# EAGLE board PIC 16F877A Board_V4.2 (SMD) (EAGLE 9.6.2)
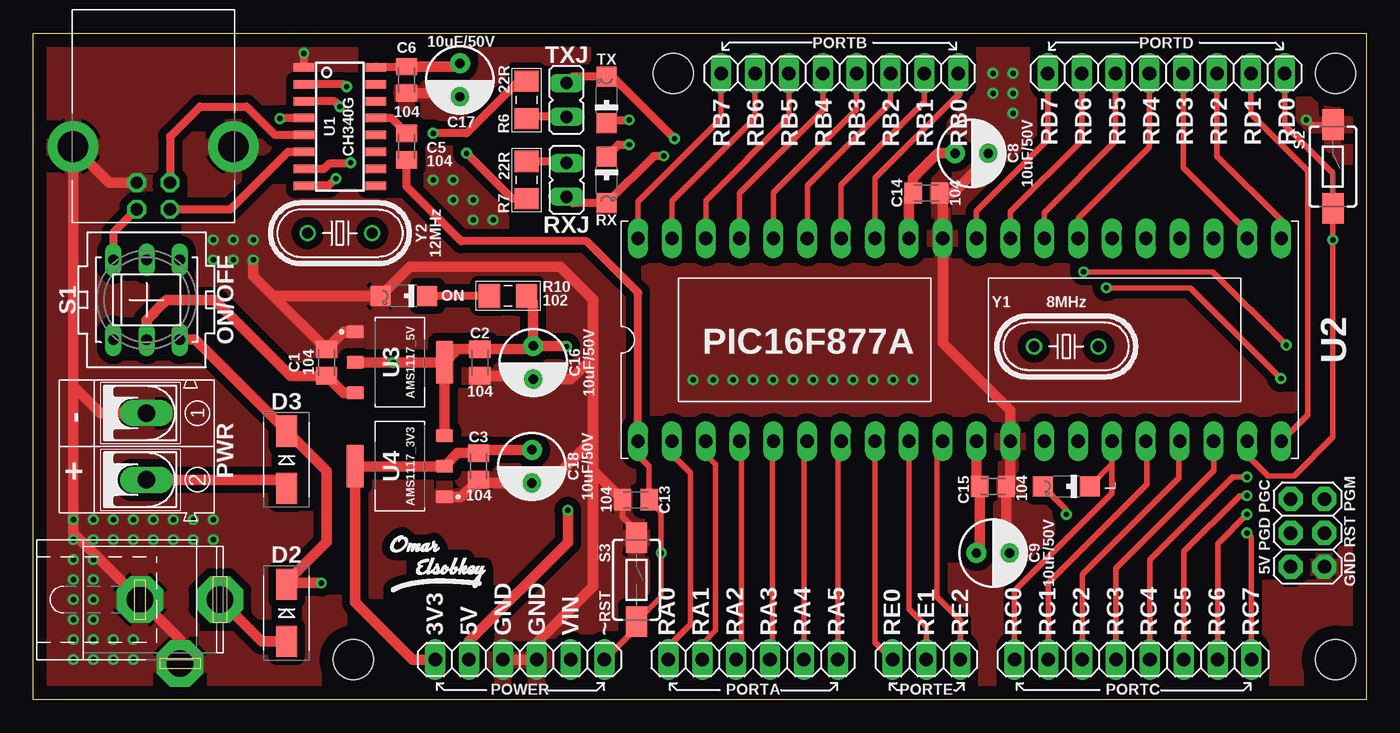
[diagram p0: board, top side]
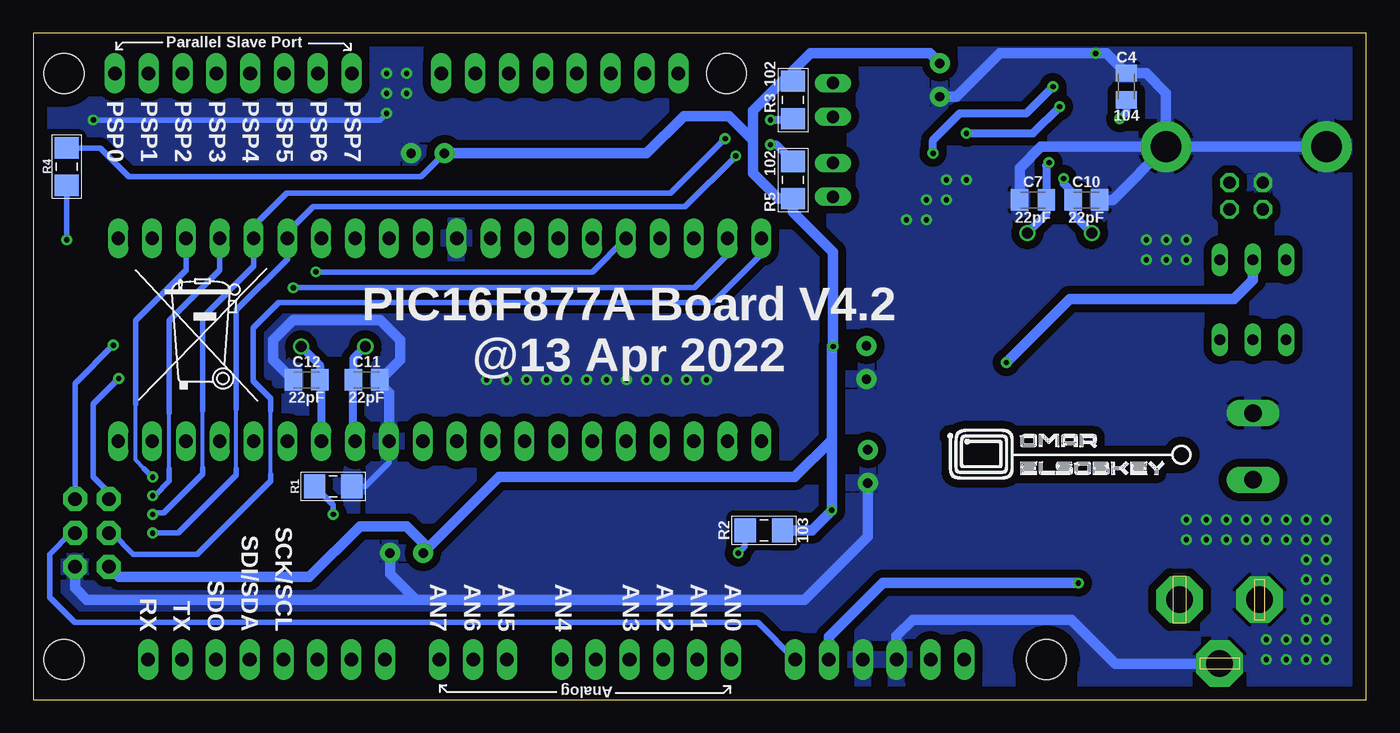
[diagram p1: board, bottom side, seen from below]

Size 100 x 50 mm. Coordinates in mm from the lower left corner, seen from the top.
Outline: 0,50 100,50 100,0 0,0 0,50
Copper layers (1*16): Top 0.035mm / dielectric 1.5mm / Bottom 0.035mm
Design rules "default *": minimum track width 0.3mm, minimum drill 0.4mm, track to track 0.3mm, track to pad 0.3mm, pad to pad 0.3mm, via to via 0.3mm, smd to smd 0.3mm, copper to edge 40mil, drill to drill 6mil, minimum pad ring 5mil, minimum via ring 8mil, stop-mask expansion 4mil, vias tented up to drill 0mil, thermal gap 10mil
Holes 3 mm at 97.7,47 24,3 48,47 97.7,3

## Footprints (pad centres in the part's own frame; a part is rotated, then mirrored left to right if it is on the bottom)
C0805K = smd 1.3 x 1.6: 1 -1,0; 2 1,0
D5 = drill 0.7 pad 1.5: A 1.25,0; K -1.25,0
SMA/DO-214AC = smd 2.33 x 1.56: 1 -2.14,0; 2 2.14,0
SPC4077 = drill 2 pad 3.5 octagon: 1 -3,0; 2 0,-4.8; 3 3,0
61729-1011BLF = drill 0.92 pad 1.4 octagon: 1 1.25,4.71; 2 -1.25,4.71; 3 -1.25,2.71; 4 1.25,2.71 | drill 2.3 pad 3.8: SH1 -6.02,0; SH2 6.02,0
CHIPLED_1206 = smd 1.5 x 1.5: A 0,-1.75; C 0,1.75
1X06 = drill 1.016 long: 1 -6.35,0; 2 -3.81,0; 3 -1.27,0; 4 1.27,0; 5 3.81,0; 6 6.35,0
1X08 = drill 1.016 long: 1 -8.89,0; 2 -6.35,0; 3 -3.81,0; 4 -1.27,0; 5 1.27,0; 6 3.81,0; 7 6.35,0; 8 8.89,0
1X03 = drill 1.016 long: 1 -2.54,0; 2 0,0; 3 2.54,0
2X03 = drill 1.016 pad 1.8 octagon: 1 -2.54,-1.27; 2 -2.54,1.27; 3 0,-1.27; 4 0,1.27; 5 2.54,-1.27; 6 2.54,1.27
2P = drill 1.321 long: 1 -2.5,0; 2 2.5,0
1206 = smd 1.6 x 1.8: 1 -1.4,0; 2 1.4,0
JP1 = drill 0.914 long: 1 0,-1.27; 2 0,1.27
PVA2R = drill 0.813 long: 1 -2.997,2.489; 2 -2.997,0; 3 -2.997,-2.489; 4 2.997,2.489; 5 2.997,0; 6 2.997,-2.489
TACTILE_SWITCH_SMD_6.0X3.5MM = smd 2.3 x 1.6: 1 -3.15,0; 2 3.15,0
SOP-16 = smd 0.635 x 1.524: 1 -4.445,-2.695; 2 -3.175,-2.695; 3 -1.905,-2.695; 4 -0.635,-2.695; 5 0.635,-2.695; 6 1.905,-2.695; 7 3.175,-2.695; 8 4.445,-2.695; 9 4.445,2.695; 10 3.175,2.695; 11 1.905,2.695; 12 0.635,2.695; 13 -0.635,2.695; 14 -1.905,2.695; 15 -3.175,2.695; 16 -4.445,2.695
PDIP-40 = drill 0.991 pad 1.2 long: 1 -7.62,24.13; 2 -7.62,21.59; 3 -7.62,19.05; 4 -7.62,16.51; 5 -7.62,13.97; 6 -7.62,11.43; 7 -7.62,8.89; 8 -7.62,6.35; 9 -7.62,3.81; 10 -7.62,1.27; 11 -7.62,-1.27; 12 -7.62,-3.81; 13 -7.62,-6.35; 14 -7.62,-8.89; 15 -7.62,-11.43; 16 -7.62,-13.97; 17 -7.62,-16.51; 18 -7.62,-19.05; 19 -7.62,-21.59; 20 -7.62,-24.13; 21 7.62,-24.13; 22 7.62,-21.59; 23 7.62,-19.05; 24 7.62,-16.51; 25 7.62,-13.97; 26 7.62,-11.43; 27 7.62,-8.89; 28 7.62,-6.35; 29 7.62,-3.81; 30 7.62,-1.27; 31 7.62,1.27; 32 7.62,3.81; 33 7.62,6.35; 34 7.62,8.89; 35 7.62,11.43; 36 7.62,13.97; 37 7.62,16.51; 38 7.62,19.05; 39 7.62,21.59; 40 7.62,24.13
SOT223 = smd 0.93 x 1.31: 1 -2.29,-3.345; 2 0,-3.345; 3 2.29,-3.345 | smd 3.24 x 1.31: 4 0,3.345
HC49U = drill 0.813: 1 -2.413,0; 2 2.413,0

## Placement (x,y rotation side)
C1  104  [C0805K]  22,25.3 90 top
C2  104  [C0805K]  33.5,25.3 270 top
C3  104  [C0805K]  33.4,17.5 270 top
C4  104  [C0805K]  18,46 270 bottom
C5  104  [C0805K]  28,41.5 270 top
C6  104  [C0805K]  28,46.5 270 top
C7  22pF  [C0805K]  25,37.5 180 bottom
C8  10uF/50V  [D5]  70.4,41 180 top
C9  10uF/50V  [D5]  72,11 180 top
C10  22pF  [C0805K]  21,37.5 0 bottom
C11  22pF  [C0805K]  75,24 0 bottom
C12  22pF  [C0805K]  79.5,24 180 bottom
C13  104  [C0805K]  45.2,15 180 top
C14  104  [C0805K]  67,38 0 top
C15  104  [C0805K]  72,16 0 top
C16  10uF/50V  [D5]  37.5,25.3 90 top
C17  10uF/50V  [D5]  32,46.5 90 top
C18  10uF/50V  [D5]  37.4,17.5 90 top
D2  DIODE_SMD  [SMA/DO-214AC]  19,6.5 270 top
D3  DIODE_SMD  [SMA/DO-214AC]  19,18 270 top
J1  [SPC4077]  11,7.5 0 top
J2  61729-1011  [61729-1011BLF]  9,41.5 180 top
L  [CHIPLED_1206]  77.5,16 90 top
ON  [CHIPLED_1206]  27.8,30.3 90 top
PORTA  [1X06]  54,3 0 top
PORTB  [1X08]  60.5,47 180 top
PORTC  [1X08]  82.5,3 0 top
PORTD  [1X08]  85,47 180 top
PORTE  [1X03]  67,3 0 top
POWER  [1X06]  36.5,3 180 top
PROGRAMMING  [2X03]  95.6,12.5 270 top
PWR  [2P]  8.5,19 270 top
R1  102  [1206]  77.5,16 180 bottom
R2  103  [1206]  45.2,12.7 0 bottom
R3  102  [1206]  43,45 90 bottom
R4  103  [1206]  97.5,40 90 bottom
R5  102  [1206]  43,39 270 bottom
R6  22R  [1206]  37,45 270 top
R7  22R  [1206]  37,39 90 top
R10  102  [1206]  35.6,30.3 0 top
RX  [CHIPLED_1206]  43,39 180 top
RXJ  [JP1]  40,39 0 top
S1  ON/OFF  [PVA2R]  8.5,30 270 top
S2  FLASH  [TACTILE_SWITCH_SMD_6.0X3.5MM]  97.5,40 270 top
S3  RST  [TACTILE_SWITCH_SMD_6.0X3.5MM]  45.25,9 270 top
TX  [CHIPLED_1206]  43,45 0 top
TXJ  [JP1]  40,45 180 top
U1  CH340G  [SOP-16]  23,43 270 top
U2  PIC16F877A  [PDIP-40]  69.5,27 90 top
U3  AMS1117_5V  [SOT223]  27.5,25.3 270 top
U4  AMS1117_3V3  [SOT223]  27.5,17.5 90 top
U$1  [OMAR_ELSOBKEY_2_X1_T]  28.8,18.45 0 bottom
U$2  [OMAR_ELSOBKEY_2_X1_TP]  28.8,18.45 0 bottom
U$3  [OMAR_ELSOBKEY_1_X0.5_TN]  30,10 0 top
U$4  [MUELLTONNE_10.00]  93,22 0 bottom
U$5  [OMAR_ELSOBKEY_1_X0.5_T]  30,10 0 top
Y1  8MHz  [HC49U]  77.5,26.5 180 top
Y2  12MHz  [HC49U]  23,35 0 top

## Library data of the parts
C1-C7 C10-C15 = rcl; SPICEPREFIX: C
C8 C9 C16-C18 = Capacitors
D2 D3 = Diode SMD; AVAILABILITY: In Stock; DESCRIPTION: SMD Diodo Rectificador 1A 50V S1A SMD DO-214AC/SMA DIOTEC; MF: NKK Switches; MP: S1A; PACKAGE: DO-214 Diotec; PRICE: None
J1 = con-jack; OC_FARNELL: unknown; OC_NEWARK: unknown
J2 = Connector_USB; CATEGORY: Connector; CONTACTS: 4; CURRENT_RATING: 1A; DESCRIPTION: CONN RCPT USB2.0 TYPEB 4POS R/A; GENDER: Receptacle; MANUFACTURER: Amphenol ICC (FCI); MOUNT_TYPE: R/A; MPN: 61729-1011BLF; OPERATING_TEMP: -55°C to 85°C; PART_STATUS: Active; ROHS_COMPLIANT: RoHS Compliant; SERIES: 61729; SUB-CATEGORY: USB; TYPE: USB-B
L ON RX TX = led
PORTA PORTB PORTC PORTD PORTE POWER PROGRAMMING = pinhead
PWR = Terminal Block
R1-R7 R10 = SparkFun-Resistors
RXJ TXJ = jumper
S1 = switch-misc
S2 S3 = SparkFun-Switches; PROD_ID: SWCH-00815; SF_SKU: COM-08229
U1 = CH340G
U2 = PIC; AVAILABILITY: Good; DESCRIPTION: PIC PIC® 16F Microcontroller IC 8-Bit 20MHz 14KB (8K x 14) FLASH 44-TQFP (10x10); MF: Microchip; MP: PIC16F877A-I/P; PACKAGE: DIP-40 Microchip; PRICE: None; PURCHASE-URL: https://pricing.snapeda.com/search/part/PIC16F877A-I/P/?ref=eda
U3 U4 = v-reg
U$1-U$3 U$5 = Logos
U$4 = logo
Y1 Y2 = SparkFun-Clocks

## Nets
+3V3: C3.1 C18.A POWER.6 U4.2 U4.4
+5V: C2.1 C6.1 C8.A C9.A C14.1 C15.1 C16.A C17.A POWER.5 PROGRAMMING.5 R2.2 R3.2 R4.2 R5.2 R10.2 S1.2 U1.16 U2.11 U2.32 U3.2 U3.4 U4.3
+5V_USB: J2.1 S1.3
D+: J2.3 U1.5
D-: J2.2 U1.6
DTR: C5.1 U1.13
GND [GND]: C1.2 C2.2 C3.2 C4.1 C6.2 C7.2 C8.K C9.K C10.2 C11.2 C12.2 C13.2 C14.2 C15.2 C16.K C17.K C18.K J1.1 J1.2 J2.4 J2.SH1 J2.SH2 ON.C POWER.3 POWER.4 PROGRAMMING.6 PWR.1 R1.1 S2.1 S3.1 U1.1 U2.12 U2.31 U3.1 U4.1
N$1: R6.2 TXJ.2
N$2: R3.1 TX.A
N$3: R5.1 RX.A
N$5: L.C R1.2
N$7: D2.2 J1.3
N$8: R7.2 RXJ.2
N$13: D3.2 PWR.2
N$32: C1.1 S1.5 U3.3
N$36: ON.A R10.1
OSC1: C11.1 U2.13 Y1.2
OSC2: C12.1 U2.14 Y1.1
RA0/AN0: PORTA.1 U2.2
RA1/AN1: PORTA.2 U2.3
RA2/AN2: PORTA.3 U2.4
RA3/AN3: PORTA.4 U2.5
RA4: PORTA.5 U2.6
RA5/AN4: PORTA.6 U2.7
RB0: PORTB.1 U2.33
RB1: PORTB.2 U2.34
RB2: PORTB.3 U2.35
RB3/PGM: PORTB.4 PROGRAMMING.2 U2.36
RB4: PORTB.5 U2.37
RB5: PORTB.6 U2.38
RB6/PGC: PORTB.7 PROGRAMMING.1 U2.39
RB7/PGD: PORTB.8 PROGRAMMING.3 U2.40
RC0: L.A PORTC.1 U2.15
RC1: PORTC.2 U2.16
RC2: PORTC.3 U2.17
RC3/SCK/SCL: PORTC.4 U2.18
RC4/SDI/SDA: PORTC.5 U2.23
RC5/SDO: PORTC.6 U2.24
RD0/PSP0: PORTD.1 R4.1 S2.2 U2.19
RD1/PSP1: PORTD.2 U2.20
RD2/PSP2: PORTD.3 U2.21
RD3/PSP3: PORTD.4 U2.22
RD4/PSP4: PORTD.5 U2.27
RD5/PSP5: PORTD.6 U2.28
RD6/PSP6: PORTD.7 U2.29
RD7/PSP7: PORTD.8 U2.30
RE0/AN5: PORTE.1 U2.8
RE1/AN6: PORTE.2 U2.9
RE2/AN7: PORTE.3 U2.10
RST: C5.2 C13.1 POWER.1 PROGRAMMING.4 R2.1 S3.2 U2.1
RX: R6.1 U1.3
RXC: PORTC.8 RX.C RXJ.1 U2.26
TX: R7.1 U1.2
TXC: PORTC.7 TX.C TXJ.1 U2.25
V3: C4.2 U1.4
VIN: D2.1 D3.1 POWER.2 S1.4
XI: C7.1 U1.7 Y2.2
XO: C10.1 U1.8 Y2.1

## Tracks (layer width: path | path; a pad name or v marks a point on that pad's centre or on a via)
+3V3
  Top 0.8: C3.1 32.04,18.5 | POWER.6 28.45,3 24.16,7.3 U4.4 U4.2 31.84,18.5 C3.1 | C3.1 33.65,18.75 C18.A
+5V  (via drill 0.4)
  Top 0.6: U1.16 25.75,47.5 C6.1 | C14.1 65.69,37.69 | C15.1 70.77,16.23 | C9.A 71,11.25 | U3.4 30.84,24.14
  Top 0.8: C17.A 31.75,47.5 C6.1 | 65.69,37.69 U2.32 | C8.A 67.85,41 66,39.15 C14.1 | 70.77,16.23 U2.11 | 71,11.25 C15.1 | v40,26.5 39.95,26.55 C16.A | 33.75,26.55 C2.1 | U3.4 U4.3 | POWER.5 32.69,4.39 40.1,11.8 v40.1,14.2 | U3.2 v27,25.3 U3.4 | C16.A 37.25,26.3 C2.1 | C2.1 31.84,26.3 | U3.4 31.84,26.3 | 31.84,26.3 30.9,26.3 30.7,26.1 30.7,25.45 U3.4 | R10.2 37.5,29.8 C16.A
  Bottom 0.406: C8.A 70.9,39.25 92.85,39.25 95,41.4 R4.2
  Bottom 0.8: 40.1,19.5 v40.1,14.2 41.6,12.7 R2.2 | 40.1,19.5 40.1,26.5 v40,26.5 40,33.6 43,36.6 R5.2 44.1,37.6 46,39.5 46,42 | 46,42 46,44.2 43.8,46.4 R3.2 43,47.18 41.68,48.5 32.75,48.5 C17.A | 46,42 47.8,43.8 51.2,43.8 54,41 C8.A | S1.2 8.5,31.5 9.95,30.05 22.25,30.05 v27,25.3 | PROGRAMMING.5 93.56,9.19 79.31,9.19 75.5,13 72,13 70.75,11.75 C9.A 65.05,16.7 42.9,16.7 40.1,19.5
+5V_USB
  Top 0.6: S1.3 6,35.04 J2.1
D+
  Top 0.6: U1.5 18.14,42.37 16,44.5 12.5,44.5 10.25,42.25 J2.3
D-
  Top 0.6: J2.2 14.79,36.79 19.09,41.09 U1.6
DTR
  Top 0.6: C5.1 26.86,43.63 U1.13
GND  (via drill 0.4)
  Top 0.406: S2.1 95.85,43.15 v95.5,43.5 | C13.2 44.2,13.7 45.25,12.65 S3.1
  Top 0.6: 24.45,27.59 U3.1 | C14.2 68.23,37.77 | C9.K 73,11.25 | C13.2 44.1,14.9 | U1.1 v20.3,48.5
  Top 0.8: 2.98,23.52 J2.SH2 5.69,38.79 J2.4 | 2.98,23.52 2.98,12.52 J1.1 11,4.5 J1.2 | C17.K 31.75,45.5 C6.2 | 37.15,16.5 C18.K | 36.45,16.25 C18.K | 41.99,25.7 41.99,30 39.5,32.5 28.25,32.5 ON.C 18,30.3 | 41.99,25.7 41.99,19.5 | 68.23,37.77 U2.31 68.23,26.77 73.31,21.69 U2.12 73.31,16.31 C15.2 73,11.25 | C8.K 71.65,40.65 69,38 C14.2 | PWR.1 5,21.5 2.98,23.52 | POWER.4 POWER.3 37.77,4.27 41.99,8.49 41.99,17.2 | U3.1 23.29,27.59 C1.2 18,30.3 | U4.1 32.11,15.21 C3.2 33.65,16.25 C18.K | C2.2 37.2,24.3 37.5,24 C16.K 40.34,24.05 41.99,25.7 | 41.99,17.2 41.99,19.5 | C13.2 41.99,17.2 | C18.K 38.74,16.25 41.99,19.5 | 18,30.3 16.5,31.8 v16.5,33
  Bottom 0.406: R1.1 75.1,16 73.31,17.79 U2.12 | v95.5,43.5 74,43.5 v73.5,44
  Bottom 0.6: J2.SH1 15.02,41.48 15,41.5
  Bottom 0.8: C17.K 30.75,45.25 27.5,48.5 v20.3,48.5 19.5,48.5 C4.1 16.5,47 15.02,45.52 J2.SH1 | J2.SH1 J2.SH2 | J2.SH1 19.02,37.5 C10.2 | J2.SH1 24.4,41.5 26,39.9 C7.2 | J1.2 18.84,2.7 22.14,6 34,6 35.23,4.77 POWER.4 | 71.3,7.5 96,7.5 96.87,8.37 PROGRAMMING.6 | C9.K 73.25,9.45 71.3,7.5 | U2.12 73.31,23.01 74,23.7 C11.2 72.5,25.5 72.5,27 74,28.5 80.5,28.5 82,27 82,25.5 C12.2 | C18.K 37.4,12.26 42.16,7.5 71.3,7.5
  other vias: 3,13.5 13.5,13.5 12,13.5 10.5,13.5 9,13.5 7.5,13.5 6,13.5 4.5,13.5 13.5,12 12,12 10.5,12 9,12 7.5,12 6,12 4.5,12 3,12 4.5,10.5 3,10.5 4.5,9 4.5,7.5 3,9 3,7.5 3,6 4.5,6 3,4.5 4.5,4.5 6,4.5 7.5,4.5 7.5,3 6,3 4.5,3 3,3 16.5,34.5 15,33 15,34.5 13.5,33 13.5,34.5 31.5,39 33,37.5 34.5,36 33,36 31.5,37.5 30,39 73.5,47 72,47 73.5,45.5 51,24 52.5,24 49.5,24 55.5,24 57,24 54,24 60,24 61.5,24 58.5,24 64.5,24 66,24 63,24 72,45.5
  pour Bottom (isolate 0.6): 102,52 102,-2 -2,-2 -2,52
  pour Top (isolate 0.6): -2,52 102,52 102,-2 -2,-2
N$1
  Top 0.6: R6.2 37.13,43.73 TXJ.2
N$2  (via drill 0.4)
  Top 0.6: TX.A 43.25,43.5 v44.7,43.5
  Bottom 0.6: R3.1 43.1,43.5 v44.7,43.5
N$3  (via drill 0.4)
  Top 0.6: RX.A 43.9,41.65 v44.7,41.65
  Bottom 0.6: R5.1 44.25,41.65 v44.7,41.65
N$5  (via drill 0.4)
  Top 0.406: v77.5,13.9 77.5,14.25 L.C
  Bottom 0.406: R1.2 77.5,14.6 v77.5,13.9
N$7
  Top 0.8: J1.3 17.14,4.36 D2.2
N$8
  Top 0.6: R7.2 39.87,40.4 RXJ.2
N$13
  Top 0.8: PWR.2 18.36,16.5 D3.2
N$32
  Top 0.8: S1.5 8.5,28.5 9.75,29.75 10,30 13.6,30 19.3,24.3 C1.1 23.29,23.01 U3.3
N$36
  Top 0.6: R10.1 ON.A
OSC1
  Bottom 0.6: Y1.2 76,25.59 C11.1 76,19.53 U2.13
OSC2
  Bottom 0.6: Y1.1 78.5,25.09 C12.1 78.39,23.89 U2.14
RA0/AN0
  Top 0.406: U2.2 47.91,18.38 49.3,16.99 49.3,5.65 47.65,4 PORTA.1
RA1/AN1
  Top 0.406: PORTA.2 50.19,4.2 51.19,5.2 51.19,17.64 50.45,18.38 U2.3
RA2/AN2
  Top 0.406: U2.4 53.13,19.24 53.13,3.4 PORTA.3
RA3/AN3
  Top 0.406: U2.5 55.47,19.32 55.47,3.2 PORTA.4
RA4
  Top 0.406: 57.81,19.12 PORTA.5
  Top 0.6: U2.6 57.81,19.12
RA5/AN4
  Top 0.406: PORTA.6 60.35,19.12 U2.7
RB0
  Top 0.406: U2.33 63.15,39.15 69.39,45.39
  Top 0.6: PORTB.1 69.39,45.39
RB1
  Top 0.406: U2.34 60.61,38.61 66.85,44.85 PORTB.2
RB2
  Top 0.406: PORTB.3 64.31,44.81 58.07,38.57 U2.35
RB3/PGM  (via drill 0.4)
  Top 0.406: U2.36 55.53,38.03 61.77,44.27 PORTB.4 | v78.8,32.1 88.5,32.1 v94,26.6
  Bottom 0.406: U2.36 58.05,32.1 v78.8,32.1 | PROGRAMMING.2 96.87,23.73 v94,26.6
RB4
  Top 0.406: PORTB.5 59.23,44.23 52.99,37.99 U2.37
RB5
  Top 0.406: U2.38 50.45,37.45 56.69,43.69 PORTB.6
RB6/PGC  (via drill 0.4)
  Top 0.406: U2.39 47.91,37.41 54.15,43.65 PORTB.7 | v80.5,30.9 86.8,30.9 v93.6,24.1
  Bottom 0.406: U2.39 47.91,33.39 50.39,30.91 v80.49,30.91 v80.5,30.9 | v93.6,24.1 95.5,22.2 95.5,16.71 94.33,15.54 PROGRAMMING.1
RB7/PGD
  Top 0.406: PORTB.8 51.61,43.61 45.37,37.37 U2.40
  Bottom 0.305: 82.2,16.9 82.2,21.7
  Bottom 0.406: U2.40 45.37,33.43 49,29.8 81.6,29.8 83.5,27.9 83.5,23.9 82.2,22.6 82.2,21.7 | PROGRAMMING.3 94.1,12.5 92.5,10.9 87.7,10.9 82.2,16.4 82.2,16.9
RC0
  Top 0.406: PORTC.1 73.61,8.16 80.93,15.48 U2.15 80.93,17.68 L.A
RC1
  Top 0.406: U2.16 83.54,19.31 83.54,16.14 76.15,8.75 PORTC.2
RC2
  Top 0.406: PORTC.3 78.69,9.39 85.94,16.64 85.94,19.31 U2.17
RC3/SCK/SCL
  Top 0.406: PORTC.4 81.23,9.86 88.55,17.18 U2.18
RC4/SDI/SDA  (via drill 0.4)
  Top 0.406: PORTC.5 83.77,10.47 90,16.7 v91.05,16.7
  Bottom 0.305: 91.67,17.32 92.34,17.99 92.34,22.2
  Bottom 0.406: U2.23 88.55,32.21 92.34,28.43 92.34,22.2 | v91.05,16.7 91.67,17.32
RC5/SDO  (via drill 0.4)
  Top 0.406: v91.05,15.3 90.5,15.3 86.31,11.11 PORTC.6
  Bottom 0.305: 89.8,17.3 89.8,21.5
  Bottom 0.406: U2.24 86.01,32.22 89.8,28.43 89.8,21.5 | 89.8,17.3 89.8,16.4 90.9,15.3 v91.05,15.3
RD0/PSP0  (via drill 0.4)
  Top 0.406: U2.19 91.09,18.32 92.61,16.79 94.6,16.79 97.5,19.69 v97.5,34.5 S2.2 97.5,39.5 93.89,43.11 PORTD.1 93.89,46.5
  Bottom 0.406: R4.1 v97.5,34.5
RD1/PSP1
  Top 0.406: PORTD.2 91.35,43.95 95.6,39.7 95.6,21.35 U2.20
RD2/PSP2
  Top 0.406: 93.63,35.54 U2.21 93.63,35.97 88.81,40.79 PORTD.3
RD3/PSP3
  Top 0.406: PORTD.4 86.27,39.93 91.09,35.11 U2.22
RD4/PSP4
  Top 0.406: PORTD.5 83.73,41.46 78.39,36.12 U2.27
RD5/PSP5
  Top 0.406: U2.28 75.85,36.55 81.19,41.89 PORTD.6
RD6/PSP6
  Top 0.406: PORTD.7 78.65,41.95 73.31,36.61 U2.29
RD7/PSP7
  Top 0.406: U2.30 70.77,36.67 76.11,42.01 PORTD.8
RE0/AN5
  Top 0.406: U2.8 63.15,4.31 PORTE.1
RE1/AN6
  Top 0.406: U2.9 65.69,6.81 67,5.5 PORTE.2
RE2/AN7
  Top 0.406: PORTE.3 69.54,5.96 67.8,7.7 67.8,18.95 U2.10
RST  (via drill 0.4)
  Top 0.406: C13.1 | C13.1 46.2,17.5 45.37,18.33 U2.1 | C13.1 47.1,14.1 v47.1,11 47.1,7.71 S3.2 45.25,5.4 POWER.1
  Top 0.6: U2.1 45.37,30.53 41.5,34.4 32.1,34.4 28,38.5 C5.2 | 42.9,3 POWER.1 | 46.2,15.35 C13.1 46.2,15.29
  Bottom 0.406: PROGRAMMING.4 97.18,12.5 98.78,10.9 98.78,7.68 96.9,5.8 45.65,5.8 POWER.1 | 46.68,12.7 R2.1 46.6,11.51 v47.1,11
  Bottom 0.6: 46.2,13.1 R2.1 46.78,12.7
RX  (via drill 0.4)
  Top 0.6: R6.1 36.4,46.4 32.5,42.5 v30,42.5 | v23,44.5 22.59,44.91 U1.3
  Bottom 0.6: v30,42.5 25,42.5 v23,44.5
RXC  (via drill 0.4)
  Top 0.406: PORTC.8 91.39,12.16 v91.05,12.5
  Top 0.6: RXJ.1 40.48,37.25 RX.C 46.55,40.8 v47.3,40.8
  Bottom 0.305: 84.76,17.3 84.76,21.8
  Bottom 0.406: v47.3,40.8 51.1,37 79,37 80.93,35.07 80.93,34.9 80.93,33.07 84.76,29.24 84.76,21.8 | v91.05,12.5 89.13,12.5 84.76,16.86 84.76,17.3
  Bottom 0.6: U2.26 80.93,34.9
TX  (via drill 0.4)
  Top 0.6: R7.1 35.9,37.6 v32.5,41 | v23.5,46 23.32,46.17 U1.2
  Bottom 0.6: v32.5,41 32.5,42 30.5,44 25.5,44 v23.5,46
TXC  (via drill 0.4)
  Top 0.406: PORTC.7 88.85,11.7 v91.05,13.9
  Top 0.6: TXJ.1 40.48,46.75 TX.C 43.45,46.75 v48.1,42.1
  Bottom 0.305: 87.3,17.4 87.3,21.7
  Bottom 0.406: v48.1,42.1 52.2,38 81,38 83.47,35.53 U2.25 83.47,32.52 87.3,28.69 87.3,21.7 | v91.05,13.9 90.96,13.99 90.23,13.99 87.3,16.92 87.3,17.4
V3  (via drill 0.4)
  Top 0.6: U1.4 18.54,43.63 v18.5,43.6
  Bottom 0.6: C4.2 18,44.1 v18.5,43.6
VIN  (via drill 0.4)
  Top 0.8: S1.4 12.14,27 D3.1 22,17.14 22,11.84 19,8.84 D2.1 19.1,8.74 v21.6,8.74
  Bottom 0.8: POWER.2 40.31,4.69 36.26,8.74 v21.6,8.74
XI  (via drill 0.4)
  Top 0.6: U1.7 21.8,39.83 22.18,40.2 23.7,40.2 v23.8,40.3
  Bottom 0.6: Y2.2 24,36.41 C7.1 24,40.1 v23.8,40.3
XO  (via drill 0.4)
  Top 0.6: v22.7,39.1 22.16,38.55 U1.8
  Bottom 0.6: Y2.1 22,36.41 C10.1 22,38 22.7,38.7 v22.7,39.1

## Text on the board
tPlace: + -
tNames: RB7 / RB6 / RB5 / RB4 / RB3 / RB2 / RB1 / RB0 | RD7 / RD6 / RD5 / RD4 / RD3 / RD2 / RD1 / RD0 | 5V PGD PGC | GND RST PGM | RST | 3V3 / 5V / GND / GND / VIN / ~ | RA0 / RA1 / RA2 / RA3 / RA4 / RA5 | RE0 / RE1 / RE2 | RC0 / RC1 / RC2 / RC3 / RC4 / RC5 / RC6 / RC7
bNames: Parallel Slave Port | PSP7 / PSP6 / PSP5 / PSP4 / PSP3 / PSP2 / PSP1 / PSP0 | PIC16F877A Board V4.2 / @13 Apr 2022 | AN0 / AN1 / AN2 / AN3 / / AN4 | AN5 / AN6 / AN7 | SCK/SCL / SDI/SDA / SDO / TX / RX | Analog